# Altium PCB FMC_ADC_100M_10B_16CHA_TDC_PSU.PcbDoc (part 1 of 2)
Units mil, origin at the board's own origin, x right, y up, seen from the top; angles counter-clockwise.
Board outline 748.03 x 2716.54 mil, 6 copper layers (TOP, G1, L2, L3, P4, BOTTOM), stack 50.472 mil thick; 83 components, 50 nets, 259 pads, 166 vias.
Unrouted connection lines stored in the file: 1.
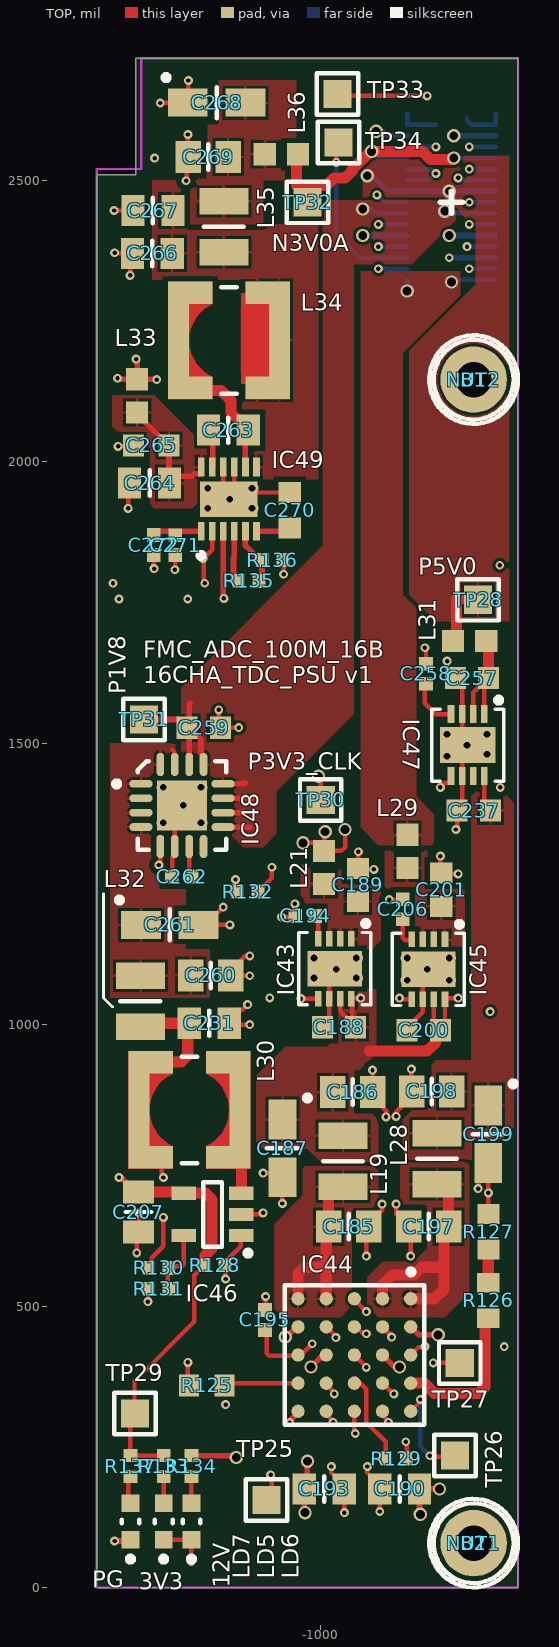
[diagram p0: TOP view]
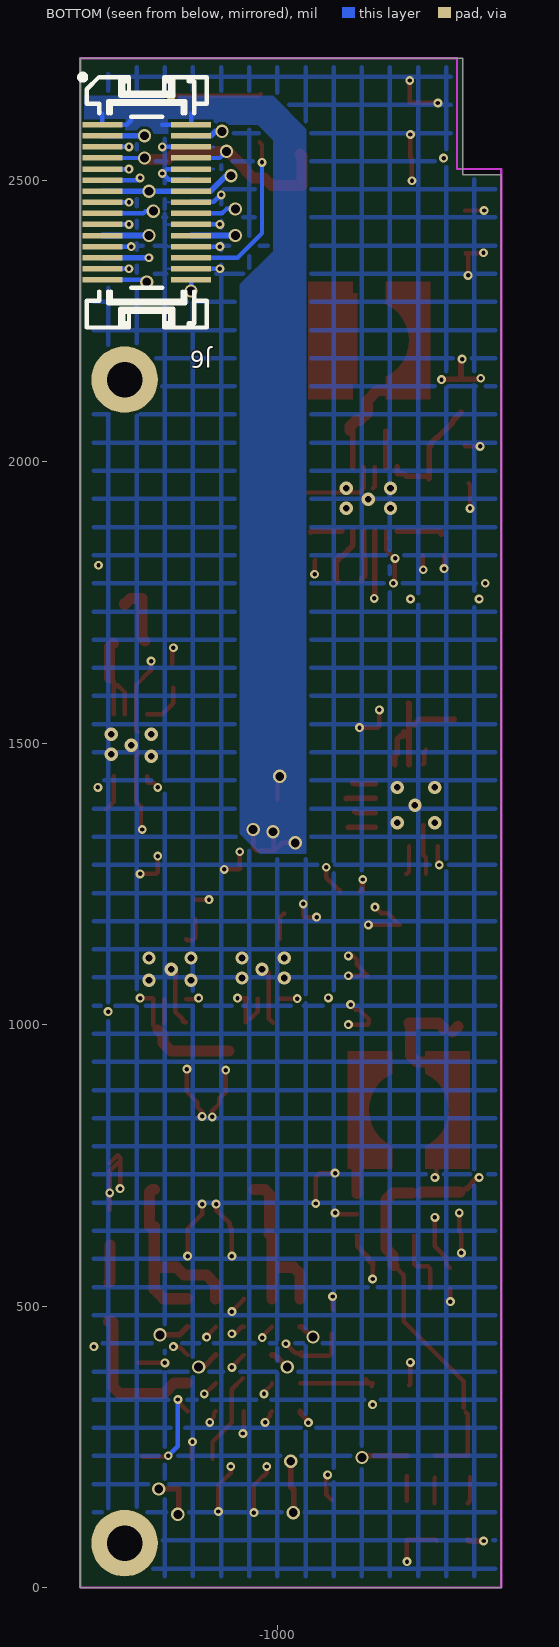
[diagram p1: BOTTOM view, seen from below]
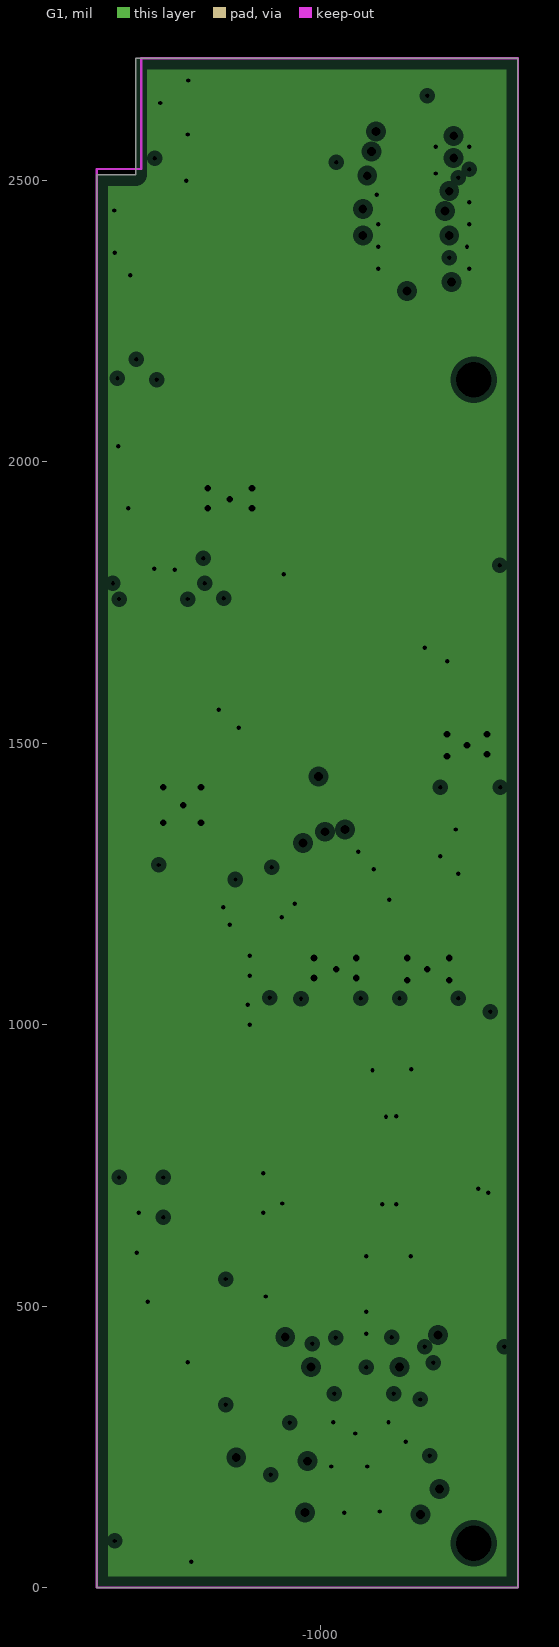
[diagram p2: G1, clearances drawn from the general rule]
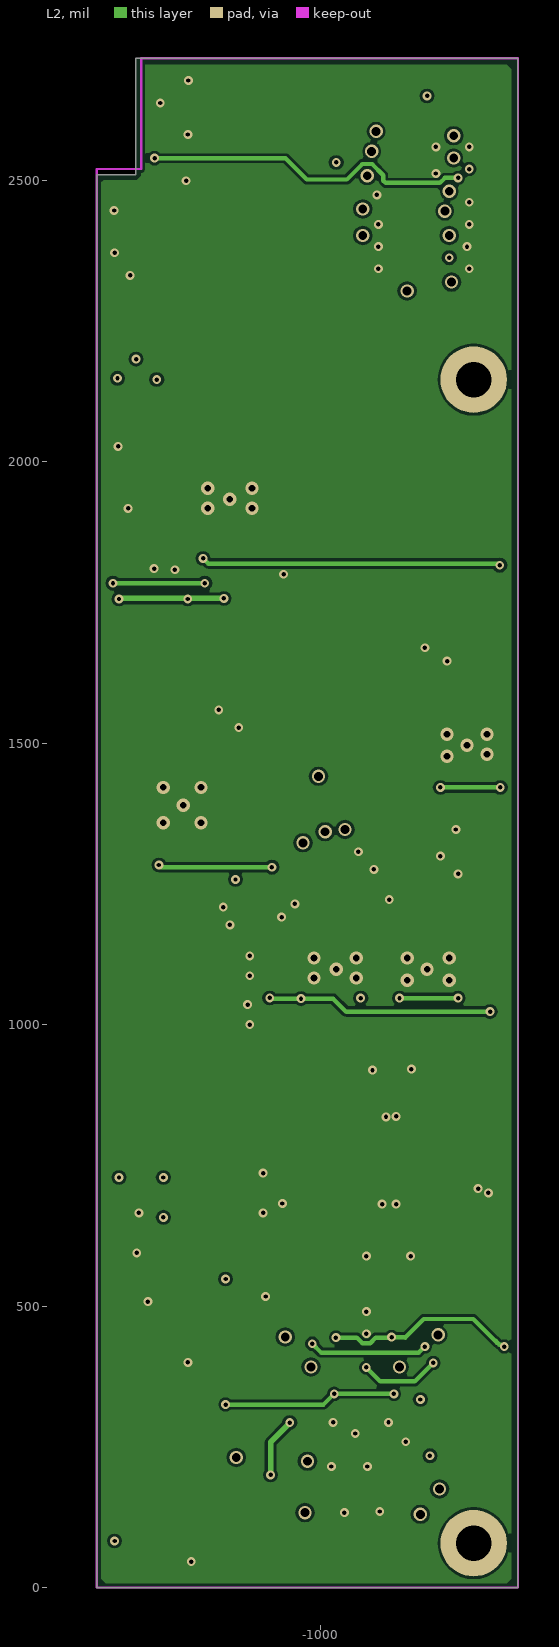
[diagram p3: L2]
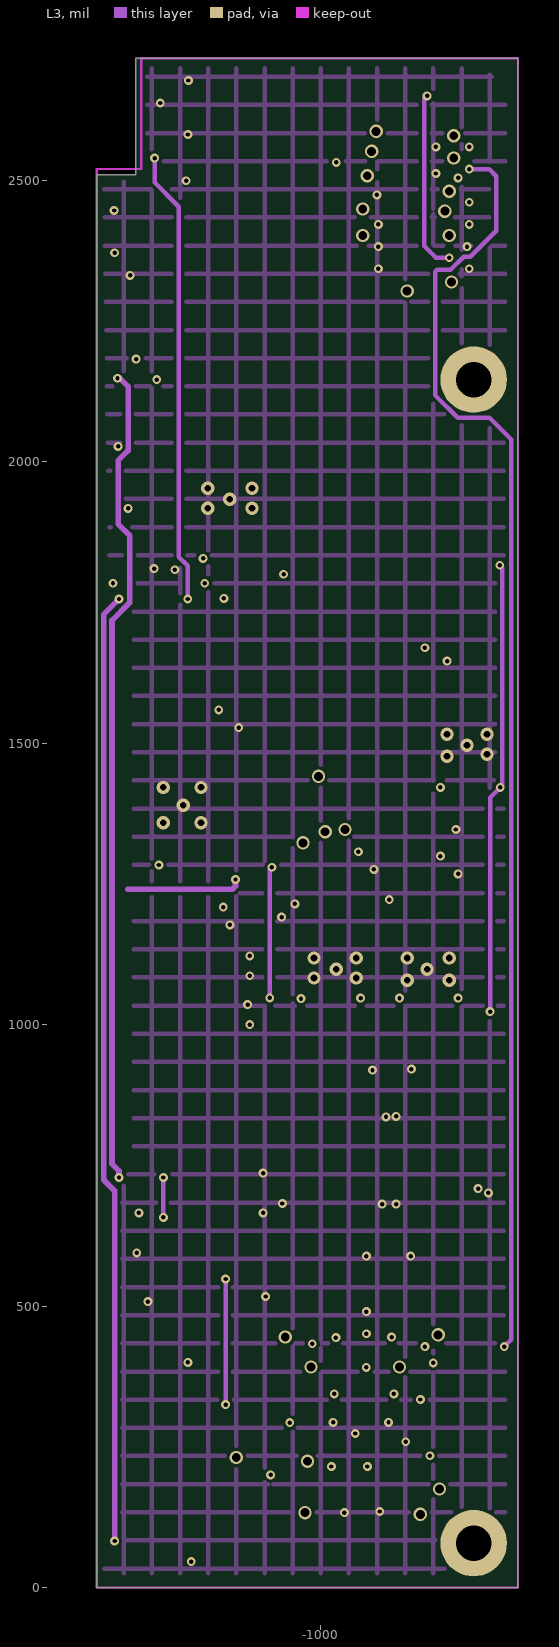
[diagram p4: L3]
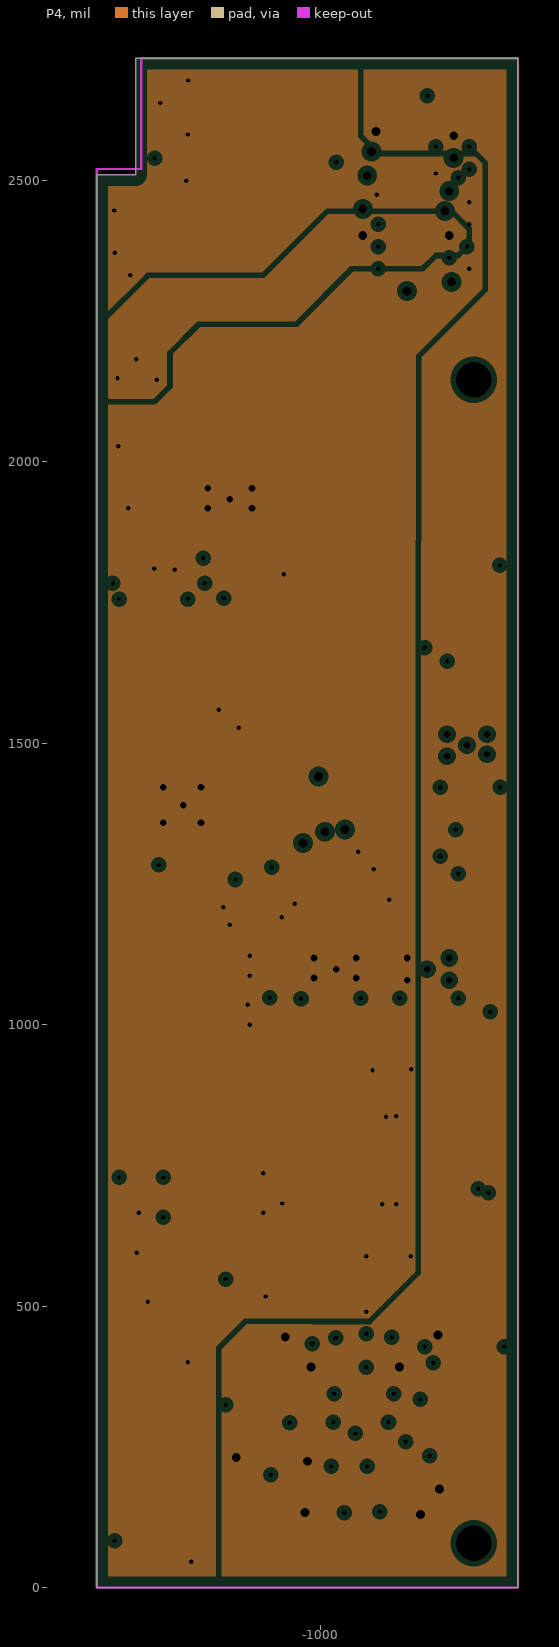
[diagram p5: P4, clearances drawn from the general rule]
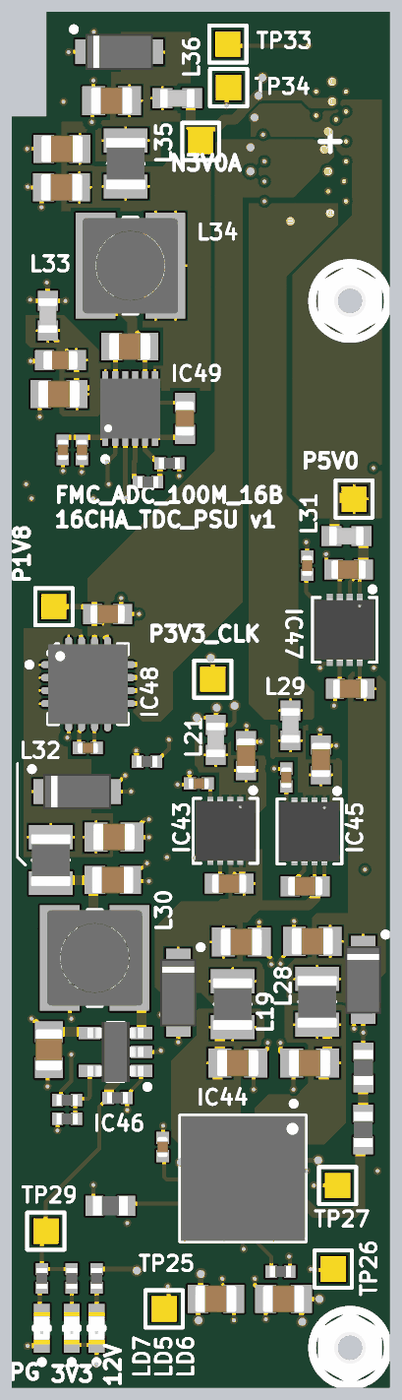
[diagram p7: 3D render of the assembled board from above, using the file's embedded part models]

## Layer stack, top to bottom
TopSolder: solder mask 0.3937, Solder Resist, Dk 3.5
TOP: signal copper 1.3778
Dielectric1: prepreg 7.0866, FR-4, Dk 4.8
G1: plane copper 0.7087, net GND
Dielectric2: core 11.811, FR-4, Dk 4.8
L2: signal copper 0.7087
Dielectric 3: prepreg 7.0866, FR-4, Dk 4.8
L3: signal copper 0.709
Dielectric 4: core 11.811, FR-4, Dk 4.8
P4: plane copper 0.7087, net (Multiple Nets)
Dielectric5: prepreg 7.0866, FR-4, Dk 4.8
BOTTOM: signal copper 1.3778
BottomSolder: solder mask 0.3937, Solder Resist, Dk 3.5

## Board outline
-1397.64,0 -1397.64,2450.79 -1397.64,2509.84 -1328.74,2509.84 -1328.74,2716.54 -649.61,2716.54 -649.61,0

## Design rules (kind name [scope] priority, off if disabled: settings)
AcuteAngle [All] p1: minimum=4.50000000000000E+0001 checktracksonly=FALSE
AssemblyTestPointUsage [All] p1 off:
AssemblyTestpoint [All] p1 off: testpointundercomponent=TRUE minsize=40 maxsize=100 preferedsize=60 minholesize=0 maxholesize=40 preferedholesize=32 testpointgrid=1 usegrid=TRUE gridtolerance=0.01 allowsidetop=TRUE allowsidebottom=TRUE
Clearance [All] p1: gap=5 ignorepadtopadclearanceinfootprint=FALSE
ComponentClearance NO_DRC [InComponentClass('NO_DRC')] p1 off: gap=0 collisioncheckmode=3 verticalgap=100000 showdistances=FALSE
ComponentClearance [All] p2 off: gap=1 collisioncheckmode=3 verticalgap=100000 showdistances=FALSE
DiffPairsRouting [All] p1: maxlimit=12 minlimit=8 mostfreqgap=10 toplayer_minwidth=15 toplayer_maxwidth=15 toplayer_prefwidth=15 midlayer1_minwidth=15 midlayer1_maxwidth=15 midlayer1_prefwidth=15 midlayer2_minwidth=15 midlayer2_maxwidth=15 midlayer2_prefwidth=15 bottomlayer_minwidth=15 bottomlayer_maxwidth=15 bottomlayer_prefwidth=15 maxuncoupledlength=600
FabricationTestPointUsage TestPointUsage [All] p1 off: valid=0 allowmultiple=FALSE
FabricationTestpoint Testpoint [All] p1 off: side=3 testpointundercomponent=TRUE minsize=40 maxsize=100 preferedsize=60 minholesize=0 maxholesize=40 preferedholesize=32 testpointgrid=1 allowsidetop=TRUE allowsidebottom=TRUE usegrid=TRUE gridtolerance=0.01
FanoutControl Fanout_BGA [IsBGA] p1 off: bgadir=Out bgaviamode=Centered fanoutstyle=Auto fanoutdirection=Alternating viagrid=1 // Fanout_BGA (Default Rule)
FanoutControl Fanout_LCC [IsLCC] p2 off: bgadir=Out bgaviamode=Centered fanoutstyle=Auto fanoutdirection=Alternating viagrid=1 // Fanout_LCC (Default Rule)
FanoutControl Fanout_SOIC [IsSOIC] p3 off: bgadir=Out bgaviamode=Centered fanoutstyle=Auto fanoutdirection=Alternating viagrid=1 // Fanout_SOIC (Default Rule)
FanoutControl Fanout_Small [(CompPinCount < 5)] p4 off: bgadir=Out bgaviamode=Centered fanoutstyle=Auto fanoutdirection=OutThenIn viagrid=1 // Fanout_Small (Default Rule)
FanoutControl Fanout_Default [All] p5 off: bgadir=Out bgaviamode=Centered fanoutstyle=Auto fanoutdirection=Alternating viagrid=1 // Fanout_Default (Default Rule)
Height Height_Top [OnTop] p1 off: minheight=0 maxheight=370 prefheight=350
Height Height_Bot [OnBottom] p2 off: minheight=0 maxheight=58 prefheight=52
HoleSize [All] p1: absolutevalues=TRUE maxlimit=1000 minlimit=5.91 maxpercent=80.000 minpercent=20.000
HoleToHoleClearance [All] p1: gap=5 allowstackedmicrovias=TRUE
MinimumAnnularRing [All] p1: minimumring=3.94
MinimumSolderMaskSliver [All] p1 off: minsoldermaskwidth=1
PlaneClearance [All] p1: clearance=9.84
PlaneConnect Vias_Plane [IsVia] p1: planeconnectstyle=Direct reliefexpansion=20 reliefentries=4 reliefconductorwidth=10 reliefairgap=10
PlaneConnect [All] p2: planeconnectstyle=Relief reliefexpansion=8 reliefentries=4 reliefconductorwidth=10 reliefairgap=8
PolygonConnect Vias [IsVia] p1: connectstyle=Direct reliefconductorwidth=10 reliefentries=4 polygonreliefangle="90 Angle" airgapwidth=10
PolygonConnect [All] p2: thpad.connectstyle=Relief thpad.reliefconductorwidth=16 thpad.reliefentries=4 thpad.polygonreliefangle="90 Angle" thpad.airgapwidth=10 smdpad.connectstyle=Relief smdpad.reliefconductorwidth=5 smdpad.reliefentries=4 smdpad.polygonreliefangle="90 Angle" smdpad.airgapwidth=5 via.connectstyle=Direct via.reliefconductorwidth=16 via.reliefentries=4 via.polygonreliefangle="90 Angle" via.airgapwidth=10
RoomDefinition FMC_ADC_100M_10B_8CHA_TDC_PSU [InComponentClass('FMC_ADC_100M_10B_8CHA_TDC_PSU')] p1 off: confinementstyle=ConfineIn formatcopy=TRUE lockcomponents=FALSE outline -1173.23,330.16 -1342.52,330.16 -1342.52,487.64 -1173.23,487.64
RoutingCorners [All] p1 off: cornerstyle=45-Degree minsetback=100 maxsetback=100
RoutingLayers [All] p1 off: top layer_v5=TRUE mid layer 1_v5=TRUE mid layer 2_v5=TRUE bottom layer_v5=TRUE
RoutingVias [All] p1: holewidth=5.91 width=15.75 viastyle="Through Hole" minholewidth=5.91 minwidth=15.75 maxholewidth=118.11 maxwidth=196.85
ShortCircuit SMA_1 [InPadClass('SMA')] p2: allowed=TRUE
SilkToSilkClearance [All] p1 off: silktosilkclearance=2
SilkToSolderMaskClearance SilkscreenOverComponentPads [IsPad] p1 off: minsilkscreentomaskgap=2 clearancetoexposedcopper=TRUE
SolderMaskExpansion [All] p1: expansion=4
ViasUnderSMD ViasUnderSMD_allow [InComponent('IC1A')   or InComponent('IC1B') or        InComponent('IC1C')   or InComponent('IC1D') or InComponent('IC6')   or InComponent('IC7') or InComponent('IC9')   or InComponent('IC10') or InComponent('IC11')   or InComponent('IC12') or InComponent('IC15A')     or InComponent('IC15B') or InComponent('IC15C') or InComponent('IC15D')  or InComponent('IC16')  or InComponent('IC3')] p1: allowed=TRUE
ViasUnderSMD [All] p2: allowed=FALSE
Width Width_1 [InNetClass('Buff_data')] p1 off: maxlimit=6.39 minlimit=3.74 preferedwidth=5.3 toplayer_minwidth=4.37 midlayer1_maxwidth=6.14 midlayer1_prefwidth=4.83 midlayer2_minwidth=3.86 midlayer2_maxwidth=6.32 midlayer2_prefwidth=4.98 bottomlayer_minwidth=4.37 minimp=45.000000 maximp=55.000000 favimp=50.000000
Width Width_3 [(InNet('RF1') OR InNet('RF2') OR InNet('RF3') OR InNet('RF4') OR InNet('RF5') OR InNet('RF6') OR InNet('RF7') OR InNet('EXT_CLK_IN'))] p2 off: maxlimit=5.72 minlimit=4.15 preferedwidth=5.3 toplayer_minwidth=4.73 midlayer1_maxwidth=5.33 midlayer1_prefwidth=4.83 midlayer2_minwidth=4.29 midlayer2_maxwidth=5.49 midlayer2_prefwidth=4.98 bottomlayer_minwidth=4.73 minimp=48.000000 maximp=53.000000 favimp=50.000000
Width Width_Pair_Diff [All] p3: maxlimit=19.68 minlimit=7.87 preferedwidth=11.81 checkconnectedcopper=TRUE
Width [All] p4: maxlimit=100 minlimit=3 preferedwidth=10 toplayer_maxwidth=20 midlayer2_maxwidth=20 minimp=45.000000 maximp=110.000000 favimp=100.000000 checkconnectedcopper=TRUE
9 further rules are at their usual default settings.

## Classes and differential pairs
pad class Direc: J3-37 J3-38
pad class SMA: J7-2

## Components (designator, comment, footprint, x,y, rotation, side; value= is the part's Value field where it differs from the comment)
B1 "Plated Hole" c300h160 -728.35,2145.67 r0 top
B2 "Plated Hole" c300h160 -728.35,78.74 r0 top
C185 "47uF" CAPC2012X140N -950.4,641.04 r180 top
C186 "47uF" CAPC2012X140N -943.4,879.97 r180 top
C187 "10uF" CAPMP3216X180N -1068,780 r270 top
C188 "4.7uF" CAPC1709X95N -967.52,995.25 r0 top
C189 "4.7uF" CAPC1709X95N -934,1248 r270 top
C190 "22uF" CAPC2012X135N -859.9,175.2 r0 top
C193 "22uF" CAPC2012X135N -993.76,175.2 r180 top
C194 "10nF" CAPC1005X55N -1027.56,1192.91 r0 top
C195 "100nF" CAPC1005X55N -1099,475.28 r270 top
C197 "47uF" CAPC2012X140N -808.4,641.04 r0 top
C198 "47uF" CAPC2012X140N -802.97,881.2 r0 top
C199 "10uF" CAPMP3216X180N -702.42,805.13 r270 top
C200 "4.7uF" CAPC1709X95N -817,990 r0 top
C201 "4.7uF" CAPC1709X95N -786,1239.53 r270 top
C206 "10nF" CAPC1005X55N -854.33,1204.72 r270 top
C207 "22uF" CAPC2012X135N -1324,667 r90 top
C231 "22uF" CAPC2012X135N -1197.83,1002.35 r180 top
C237 "4.7uF" CAPC1709X95N -728,1380 r0 top
C257 "4.7uF" CAPC1709X95N -731.32,1615.45 r0 top
C258 "10nF" CAPC1005X55N -813,1623 r270 top
C259 "4.7uF" CAPC1709X95N -1207.83,1527.37 r180 top
C260 "47uF" CAPC2012X140N -1195.27,1087.35 r180 top
C261 "10uF" CAPMP3216X180N -1268,1177 r0 top
C262 "10nF" CAPC1005X55N -1247,1263 r0 top
C263 "10uF" CAPC2012X135N -1164.06,2055.74 r0 top
C264 "22uF" CAPC2012X135N -1304.06,1961.74 r0 top
C265 "2.2uF" CAPC1608X87N -1301.06,2028.74 r0 top
C266 "22uF" CAPC2012X135N -1299,2370 r0 top
C267 "22uF" CAPC2012X135N -1298,2446 r0 top
C268 "10uF" CAPMP3216X180N -1185.04,2637.8 r0 top
C269 "47uF" CAPC2012X140N -1200,2541 r0 top
C270 "1uF" CAPC1608X87N -1054.97,1913.68 r270 top
C271 "100nF" CAPC1005X55N -1258.42,1851.63 r90 top
C272 "100nF" CAPC1005X55N -1296.42,1851.82 r90 top
IC43 "ADM7171ACPZ-3.3-R7" CP_8_21-L -974.99,1099.42 r270 top value=Value
IC44 "LTM4622AEY#PBF" BGA25C127P5X5_625X625X262 -940.21,413 r270 top
IC45 "ADM7171ACPZ-3.3-R7" CP_8_21-L -808.75,1098 r270 top value=Value
IC46 "TLV62565DBVT" SOT95P280X145-5N -1192.08,662.75 r180 top
IC47 "ADP7105ACPZ-5.0-R7" CP_8_5 -738.83,1496.25 r270 top value=Value
IC48 "ADP1740ACPZ-1.8-R7" QFN65P400X400X100-17N-S225 -1246.44,1389.21 r0 top
IC49 "TPS63710DRR" SON50P300X300X80-13N-R160X260 -1163.23,1933.37 r90 top
J6 "SlimStack™" MOLEX_52991-0308 -767.72,2460.63 r270 bottom locked
L19 "1uH" INDC2620X100N -960.4,757.3 r90 top
L21 "120R@100MHz" INDC1608X65N -994,1279 r90 top
L28 "1uH" INDC2620X100N -793.36,761.88 r90 top
L29 "120R@100MHz" INDC1608X65N -846,1307.53 r90 top
L30 "2.2uH" IND_WURTH_WE-TPC_4828 -1233.27,848.35 r180 top
L31 "120R@100MHz" INDC1608X65N -735.43,1681.51 r180 top
L32 "1uH" INDC2620X100N -1320.27,1041.56 r90 top
L33 "120R@100MHz" INDC1608X65N -1326.06,2116.74 r90 top
L34 "2.2uH" IND_WURTH_WE-TPC_4828 -1162.85,2215.35 r0 top
L35 "1uH" INDC2620X100N -1172,2417 r90 top
L36 "120R@100MHz" INDC1608X65N -1070,2546 r0 top
LD5 "Green" LED_KINGBRIGHT_KPH-1608CGCK -1278.88,117.38 r90 top
LD6 "Green" LED_KINGBRIGHT_KPH-1608CGCK -1229.67,117.38 r90 top
LD7 "Green" LED_KINGBRIGHT_KPH-1608CGCK -1337.94,117.38 r90 top
NUT1 "M1.6" BOSSARD_BN628-1241389_v -728.35,78.74 r0 top
NUT2 "M1.6" BOSSARD_BN628-1241389_v -728.35,2145.67 r0 top
R125 "11k8" RESC1608X55N -1202.5,359 r180 top
R126 "5k62" RESC1608X55N -702.42,509.85 r90 top
R127 "1k78" RESC1608X55N -702,632 r90 top
R128 "10k" RESC1005X40N -1188.27,572.35 r0 top
R129 "200k" RESC1005X40N -866,229 r180 top
R130 "100k" RESC1005X40N -1287.91,567.74 r180 top
R131 "43k" RESC1005X40N -1287.91,530.74 r0 top
R132 "10k" RESC1005X40N -1129.92,1236.22 r0 top
R133 "1k" RESC1005X40N -1278.88,215.8 r90 top
R134 "10k" RESC1005X40N -1229.67,215.8 r90 top
R135 "160k" RESC1005X40N -1128,1788 r0 top
R136 "56k" RESC1005X40N -1085.68,1825.1 r0 top
R137 "1k" RESC1005X40N -1337.94,215.8 r90 top
TP25 "Test Point" TPS127 -1096.12,155.52 r270 top
TP26 "Test Point" TPS127 -761.47,234.26 r270 top
TP27 "Test Point" TPS127 -753,399 r270 top
TP28 "Test Point" TPS127 -720.43,1754.51 r270 top
TP29 "Test Point" TPS127 -1330,309 r270 top
TP30 "Test Point" TPS127 -1000,1399 r90 top
TP31 "Test Point" TPS127 -1314,1542 r180 top
TP32 "Test Point" TPS127 -1023.62,2460.63 r90 top
TP33 "Test Point" TPS127 -970,2653 r180 top
TP34 "Test Point" TPS127 -968.5,2566.93 r0 top

## Footprints (in the part's own frame and the unit in brackets; to place one, negate y for a bottom-side part, rotate by r counter-clockwise, add the part's x,y. Pads: shape width x height; smd on the part's side, far side on the other; paste and mask are expansions set on the pad)
BGA25C127P5X5_625X625X262 [mm] "BGA, 1.27mm Pitch, Square; 25 Pin, 5 Columns X 5 Rows, 6.25mm X 6.25mm X 2.62mm H"
  round 0.6 smd: A1(-2.54,2.54) A2(-1.27,2.54) A3(0,2.54) A4(1.27,2.54) A5(2.54,2.54) B1(-2.54,1.27) B2(-1.27,1.27) B3(0,1.27) B4(1.27,1.27) B5(2.54,1.27) C1(-2.54,0) C2(-1.27,0) C3(0,0) C4(1.27,0) C5(2.54,0) D1(-2.54,-1.27) D2(-1.27,-1.27) D3(0,-1.27) D4(1.27,-1.27) D5(2.54,-1.27) E1(-2.54,-2.54) E2(-1.27,-2.54) E3(0,-2.54) E4(1.27,-2.54) E5(2.54,-2.54)
  silkscreen extent -3.87,-3.15 3.15,3.15, body extent -3.12,-3.12 3.13,3.13, height 2.62
BOSSARD_BN628-1241389_v [mil] "M1.6 Hexagon Nut ~0,8d, ISO 4032, DIN 934, Stainless Steel A2"
  silkscreen extent -79,-79 79,79, body extent -63,-73 63,73, height 51
c300h160 [mm] "Plated Through Hole: Hole Dia.=1.6mm Pad Dia.=3mm"
  round 3 hole 1.6: 1(0,0)
  silkscreen extent -1.8,-1.8 1.8,1.8
CAPC1005X55N [mm] "Capacitor, Non-Polarized, Chip; 1.00mm L X 0.50mm W X 0.70mm H, IPC Medium Density"
  rect 0.62x0.62 smd: 1(-0.45,0) 2(0.45,0)
  body extent -0.52,-0.27 0.53,0.28, height 0.55
CAPC1608X87N [mm] "Chip Capacitor, Body 1.6x0.8mm IPC Medium Density"
  rect 0.95x1 smd: 1(-0.8,0) 2(0.8,0)
  body extent -0.87,-0.47 0.88,0.48, height 0.87
CAPC1709X95N [mm] "Capacitor, non-Polarized, Chip; 1.65mm L X 0.85mm W X 0.95mm H,IPC Medium Density"
  rect 0.95x1 smd: 1(-0.75,0) 2(0.75,0)
  body extent -0.87,-0.47 0.88,0.48, height 0.95
CAPC2012X135N [mm] "Chip Capacitor, Body 2.0x1.25mm, IPC Medium Density"
  rect 1.05x1.4 smd: 1(-0.9,0) 2(0.9,0)
  silkscreen extent 0,-0.58 0,0.58, body extent -1.05,-0.67 1.05,0.68, height 1.25
CAPC2012X140N [mm] "Chip Capacitor, Body 2.0x1.25mm, IPC Medium Density"
  rect 1.15x1.45 smd: 1(-0.9,0) 2(0.9,0)
  silkscreen extent 0,-0.58 0,0.58, body extent -1.05,-0.67 1.05,0.68, height 1.3
CAPMP3216X180N [mm] "Capacitor, Polarized, Molded  Body 3.2x1.6mm, IPC Medium Density"
  rect 1.8x1.25 smd: 1(-1.3,0) 2(1.3,0)
  silkscreen extent -2.4,-0.7 0,1.25, body extent -1.7,-0.9 1.7,0.9, height 1.6
CP_8_5 [mil]
  rect 32x12 smd paste+0 mask+0: 1(-55,29.53) 2(-55,9.84) 3(-55,-9.84) 4(-55,-29.53) 5(55,-29.53) 6(55,-9.84) 7(55,9.84) 8(55,29.53)
  rect 64x98 smd paste-48.5 mask+0: 9(0,0)
  silkscreen extent -85,-64 64,64, body extent -61,-59 61,59, height 31
CP_8_21-L [mm]
  rect 0.703x0.3 smd paste+0 mask+0: 1(-1.352,0.75) 2(-1.352,0.25) 3(-1.352,-0.25) 4(-1.352,-0.75) 5(1.352,-0.75) 6(1.352,-0.25) 7(1.352,0.25) 8(1.352,0.75)
  rect 1.6x2.44 smd paste-1.207 mask+0: 9(0,0)
  silkscreen extent -2.16,-1.63 1.63,1.63, body extent -1.55,-1.5 1.55,1.5, height 0.78
IND_WURTH_WE-TPC_4828 [mm] "Shielded Tiny Power Inductor, Body 4.8x4.8mm"
  rect 0.95x5.3 smd: 1(-2.275,0) 2(2.275,0)
  rect 1.05x1.014 smd: 1(-1.275,2.143) 1(-1.275,-2.143) 2(1.275,2.143) 2(1.275,-2.143)
  TOP region: 2.75,-2.65 0.75,-2.65 0.75,-1.636 1.394,-1.138 1.753,-0.407 1.753,0.407 1.394,1.138 0.75,1.636 0.75,1.636 0.75,2.65 2.75,2.65
  TOP region: -2.75,-2.65 -0.75,-2.65 -0.75,-1.636 -1.394,-1.138 -1.753,-0.407 -1.753,0.407 -1.394,1.138 -0.75,1.636 -0.75,1.636 -0.75,2.65 -2.75,2.65
  TOP region: 0.75,-2.65 2.75,-2.65 2.75,2.65 0.75,2.65 0.75,1.636 1.394,1.138 1.753,0.407 1.753,-0.407 1.394,-1.138 0.75,-1.636 0.75,-1.636
  silkscreen extent -0.35,-2.4 0.35,2.4, body extent -2.4,-2.4 2.4,2.4, height 2.8
INDC1608X65N [mm] "Chip Inductor, 2-Leads, EIA 0603, Metric 1608, Body 1.6x0.8mm, IPC Medium Density"
  rect 1x1 smd: 1(-0.75,0) 2(0.75,0)
  body extent -0.87,-0.47 0.88,0.48, height 0.65
INDC2620X100N [mm] "Chip Inductor, EIA 1008, Metric 2520, Body 2.60mm L X 2.00mm W X 1.00mm H, IPC Medium Density"
  rect 1.2x2.2 smd: 1(-1.15,0) 2(1.15,0)
  silkscreen extent 0,-0.9 0,0.9, body extent -1.3,-1 1.3,1, height 1
LED_KINGBRIGHT_KPH-1608CGCK [mm] "SMT Green LED, Case 0603, Body L 1.6 x W 0.8mm H 0.65mm"
  rect 0.8x0.8 smd: 1(-0.825,0) 2(0.825,0)
  silkscreen extent -1.82,-0.4 0.08,0.4, body extent -0.8,-0.4 0.8,0.4, height 0.65
MOLEX_52991-0308 [mm] "0.50mm Pitch SlimStack™ Dual Row 30 Circuits Surface Mount Vertical Receptacle (3.00 and 4.00mm Stacking Heights)"
  rect 0.25x1.8 smd: 1(-3.5,-2) 2(-3.5,2) 3(-3,-2) 4(-3,2) 5(-2.5,-2) 6(-2.5,2) 7(-2,-2) 8(-2,2) 9(-1.5,-2) 10(-1.5,2) 11(-1,-2) 12(-1,2) 13(-0.5,-2) 14(-0.5,2) 15(0,-2) 16(0,2) 17(0.5,-2) 18(0.5,2) 19(1,-2) 20(1,2) 21(1.5,-2) 22(1.5,2) 23(2,-2) 24(2,2) 25(2.5,-2) 26(2.5,2) 27(3,-2) 28(3,2) 29(3.5,-2) 30(3.5,2)
  silkscreen extent -5.77,-3.01 5.65,2.7, body extent -5.65,-2.7 5.65,2.7, height 2.32
QFN65P400X400X100-17N-S225 [mm] "QFN, 0.65mm pitch,square; 4 pin X 4 pin, 4mm X 4mm X 1mm H body (w/thermal tab 2.25 X 2.25mm),  IPC Medium Density"
  oval 1.05x0.35 smd: 1(-1.85,0.975) 2(-1.85,0.325) 3(-1.85,-0.325) 4(-1.85,-0.975) 9(1.85,-0.975) 10(1.85,-0.325) 11(1.85,0.325) 12(1.85,0.975)
  oval 0.35x1.05 smd: 5(-0.975,-1.85) 6(-0.325,-1.85) 7(0.325,-1.85) 8(0.975,-1.85) 13(0.975,1.85) 14(0.325,1.85) 15(-0.325,1.85) 16(-0.975,1.85)
  rect 2.25x2.25 smd: 17(0,0)
  silkscreen extent -3.07,-2 2,2, body extent -2,-2 2,2, height 1
RESC1005X40N [mm] "Chip Resistor, EIA 0402, Metric 1005, Body 1.0x0.5mm, IPC Medium Density"
  rect 0.58x0.62 smd: 1(-0.47,0) 2(0.47,0)
  body extent -0.52,-0.27 0.53,0.28, height 0.4
RESC1608X55N [mm] "Chip Resistor, EIA 0603, Metric 1608, Body 1.6x0.8mm, IPC Medium Density"
  rect 0.9x1 smd: 1(-0.8,0) 2(0.8,0)
  body extent -0.87,-0.47 0.88,0.48, height 0.55
SON50P300X300X80-13N-R160X260 [mm] "SON, 0.50mm Pitch, 12-Pin, 3.00mm W  X 3.00mm L X 0.80mm Height, (w/Thermal Tab 1.6 X 2.6 mm), IPC Medium Density"
  rect 0.85x0.3 smd: 1(-1.45,1.25) 2(-1.45,0.75) 3(-1.45,0.25) 4(-1.45,-0.25) 5(-1.45,-0.75) 6(-1.45,-1.25) 7(1.45,-1.25) 8(1.45,-0.75) 9(1.45,-0.25) 10(1.45,0.25) 11(1.45,0.75) 12(1.45,1.25)
  rect 1.6x2.6 smd: 13(0,0)
  silkscreen extent -2.66,1.12 -2.42,1.37, body extent -1.5,-1.5 1.5,1.5, height 0.8
SOT95P280X145-5N [mm] "SOT, 0.95mm pitch; 5 pin, 1.60mm W X 2.90mm L X 1.45mm H body, IPC Medium Density"
  rect 1.1x0.6 smd: 1(-1.3,0.95) 2(-1.3,0) 3(-1.3,-0.95) 4(1.3,-0.95) 5(1.3,0.95)
  silkscreen extent -1.73,-1.45 0.43,1.87, body extent -1.4,-1.5 1.4,1.5, height 1.45
TPS127 [mil] "1.27 x  1.27mm SMD Test Point Area"
  rect 50x50 smd paste-50: 1(0,0)
  silkscreen extent -37,-37 37,37

## Part data
B1 B2: library part PLATED_HOLE1.6_PAD3.0, "Single Terminal Socket", Author="CERN DEM JMW", ComponentHeight=0mm, Component Type="Standard (No BOM)", CreateDate=05.11.2009, Family="Plated Hole", HelpURL=Undefined, LatestRevisionDate=05.11.2009, Mounted=No, PackageDescription="Plated Through Hole: Hole Dia.=1.6mm Pad Dia.=3.0mm", Part Description="Plated Through Hole: Hole Dia.=1.6mm Pad Dia.=3.0mm", Part Number=PLATED_HOLE1.6_PAD3.0, Pin Count=1, Sense=No, SMD=No, Socket=No, Status=None
C185 C186 C197 C198 C260 C269: library part CC0805_47UF_6.3V_20%_X5R, "Non-polarised capacitor", Case=0805, Manufacturer=GENERIC, Manufacturer1 ComponentHeight=1.4mm, Manufacturer1 Example=KEMET, Manufacturer1 Part Number=C0805C476M9PACTU, Tolerance=±20%, Voltage=6.3V, Author="CERN DEM JLC", Component Type=Standard, CreateDate=16.10.2012, HelpURL=\\cern.ch\dfs\Applications\Altium\Datasheets\CC0805_X5R_KEMET.pdf, LatestRevisionDate=16.10.2012, Manufacturer Part Number=CC0805_47UF_6.3V_20%_X5R, Mounted=Yes, Part Description="SMD Multilayer Chip Ceramic Capacitor", Part Number=CC0805_47UF_6.3V_20%_X5R, Pin Count=2, Sense=No, SMD=Yes, Socket=No, Status=Preferred, TC=X5R
C187 C199 C261 C268: library part CTE3216-18_10UF_10V_10%_LESR1800, "Polarised capacitor", Case=A, Manufacturer=GENERIC, Manufacturer1 ComponentHeight=1.8mm, Manufacturer1 Example=AVX, Manufacturer1 Part Number=TPSA106K010R1800, Tolerance=±10%, Voltage=10V, Author="CERN DEM JLC", Component Type=Standard, CreateDate=05.05.2008, HelpURL=\\cern.ch\dfs\Applications\Altium\Datasheets\CTE-LESR_AVX_TPS.pdf, LatestRevisionDate=20.01.2009, Manufacturer Part Number=CTE3216-18_10UF_10V_10%_LESR1800, Mounted=Yes, Part Description="Low ESR 1R8 Solid Tantalum Chip Capacitor", Part Number=CTE3216-18_10UF_10V_10%_LESR1800, Pin Count=2, Sense=No, SMD=Yes, Socket=No, Status=Preferred
C188 C189 C200 C201 C237 C257 C259: library part CC0603_4.7UF_16V_10%_X5R, "Non-polarised capacitor", Case=0603, Manufacturer=GENERIC, Manufacturer1 ComponentHeight=0.95mm, Manufacturer1 Example="TAIYO YUDEN", Manufacturer1 Part Number=EMK107ABJ475KA-T, Tolerance=±10%, Voltage=16V, Author="CERN DEM JLC", Component Type=Standard, CreateDate=16.12.2013, HelpURL=\\cern.ch\dfs\Applications\Altium\Datasheets\CC0603_X7R_TAIYO-YUDEN_HIGH-VALUE.pdf, LatestRevisionDate=16.09.2014, Manufacturer Part Number=CC0603_4.7UF_16V_10%_X5R, Mounted=Yes, Part Description="SMD Multilayer Chip Ceramic Capacitor", Part Number=CC0603_4.7UF_16V_10%_X5R, Pin Count=2, Sense=No, SMD=Yes, Socket=No, Status=None, TC=X5R
C190 C193 C207 C231 C264 C266 C267: library part CC0805_22UF_16V_10%_X5R, "Non-polarised capacitor", Case=0805, Manufacturer=GENERIC, Manufacturer1 ComponentHeight=1.35mm, Manufacturer1 Example=TDK, Manufacturer1 Part Number=C2012X5R1C226KT, Tolerance=±10%, Voltage=16V, Author="CERN DEM JLC", Component Type=Standard, CreateDate=25.10.2012, HelpURL=\\cern.ch\dfs\Applications\Altium\Datasheets\CC0805_X5R_TDK_C.pdf, LatestRevisionDate=25.10.2012, Manufacturer Part Number=CC0805_22UF_16V_10%_X5R, Mounted=Yes, Part Description="SMD Multilayer Chip Ceramic Capacitor", Part Number=CC0805_22UF_16V_10%_X5R, Pin Count=2, Sense=No, SMD=Yes, Socket=No, Status=Preferred, TC=X5R
C194 C206 C258 C262: library part CC0402_10NF_16V_10%_X7R, "Non-polarised capacitor", Case=0402, Manufacturer=GENERIC, Manufacturer1 ComponentHeight=0.55mm, Manufacturer1 Example=PHYCOMP, Manufacturer1 Part Number=223878715636, Tolerance=±10%, Voltage=16V, Author="CERN DEM JLC", Component Type=Standard, CreateDate=03.12.2007, HelpURL=\\cern.ch\dfs\Applications\Altium\Datasheets\CC0402_X7R_PHYCOMP.pdf, LatestRevisionDate=03.12.2007, Manufacturer Part Number=CC0402_10NF_16V_10%_X7R, Mounted=Yes, Part Description="SMD Multilayer Chip Ceramic Capacitor", Part Number=CC0402_10NF_16V_10%_X7R, Pin Count=2, Sense=No, SMD=Yes, Socket=No, Status="Not Recommended", TC=X7R
C195 C271 C272: library part CC0402_100NF_16V_10%_X5R, "Non-polarised capacitor", Case=0402, Manufacturer=GENERIC, Manufacturer1 ComponentHeight=0.55mm, Manufacturer1 Example=MURATA, Manufacturer1 Part Number=GRM155R61C104KA88D, Tolerance=±10%, Voltage=16V, Author="CERN DEM JLC", Component Type=Standard, CreateDate=10.12.2013, HelpURL=\\cern.ch\dfs\Applications\Altium\Datasheets\CC0402_X5R_MURATA_GRM.pdf, LatestRevisionDate=10.12.2013, Manufacturer Part Number=CC0402_100NF_16V_10%_X5R, Mounted=Yes, Part Description="SMD Multilayer Chip Ceramic Capacitor", Part Number=CC0402_100NF_16V_10%_X5R, Pin Count=2, Sense=No, SMD=Yes, Socket=No, Status=None, TC=X5R
C263: library part CC0805_10UF_16V_10%_X5R, "Non-polarised capacitor", Case=0805, Manufacturer=GENERIC, Manufacturer1 ComponentHeight=1.4mm, Manufacturer1 Example=KEMET, Manufacturer1 Part Number=C0805C106K4PAC, Tolerance=±10%, Voltage=16V, Author="CERN DEM JLC", Component Type=Standard, CreateDate=03.12.2007, HelpURL=\\cern.ch\dfs\Applications\Altium\Datasheets\CC1206_X5R_KEMET.pdf, LatestRevisionDate=03.12.2007, Manufacturer Part Number=CC0805_10UF_16V_10%_X5R, Mounted=Yes, Part Description="SMD Multilayer Chip Ceramic Capacitor", Part Number=CC0805_10UF_16V_10%_X5R, Pin Count=2, Sense=No, SMD=Yes, Socket=No, Status=Preferred, TC=X5R
C265: library part CC0603_2.2UF_16V_10%_X5R, "Non-polarised capacitor", Case=0603, Manufacturer=GENERIC, Manufacturer1 ComponentHeight=0.9mm, Manufacturer1 Example=YAGEO, Manufacturer1 Part Number=CC0603KRX5R7BB225, Tolerance=±10%, Voltage=16V, Author="CERN DEM JLC", Component Type=Standard, CreateDate=28.04.2011, HelpURL=\\cern.ch\dfs\Applications\Altium\Datasheets\CC0805_X5R_PHYCOMP_HC.pdf, LatestRevisionDate=28.04.2011, Manufacturer Part Number=CC0603_2.2UF_16V_10%_X5R, Mounted=Yes, Part Description="SMD Multilayer Chip Ceramic Capacitor", Part Number=CC0603_2.2UF_16V_10%_X5R, Pin Count=2, Sense=No, SMD=Yes, Socket=No, Status=Preferred, TC=X5R
C270: library part CC0603_1UF_16V_10%_X7R, "Non-polarised capacitor", Case=0603, Manufacturer=GENERIC, Manufacturer1 ComponentHeight=0.9mm, Manufacturer1 Example="YAGEO PHYCOMP", Manufacturer1 Part Number=223878615663, Manufacturer Part Number=CC0603_1uF_16V_10%_X7R, Tolerance=±10%, Voltage=16V, Author="CERN DEM JLC", Component Type=Standard, CreateDate=03.12.2007, HelpURL=\\cern.ch\dfs\Applications\Altium\Datasheets\CC0603_X7R_PHYCOMP.pdf, LatestRevisionDate=17.04.2015, Mounted=Yes, Part Description="SMD Multilayer Chip Ceramic Capacitor", Part Number=CC0603_1UF_16V_10%_X7R, Pin Count=2, Sense=No, SMD=Yes, Socket=No, Status=None, TC=X7R
IC43 IC45: "6.5 V, 1 A, Ultralow Noise, High PSRR,  Fast Transient Response CMOS LDO", Manufacturer="Analog Devices", Manufacturer Part Number=ADM7171ACPZ-3.3-R7, Type=Type
IC44: "3.6V-20V To 1.5V-12V, Dual 2A or Single 4A  Ultrathin Step-Down DC/DC µModule Regulator", Case=BGA25, Manufacturer="LINEAR TECHNOLOGY", Author="CERN DEM MR", Bonding=No, ComponentHeight=2.62mm, Component Type=Standard, CreateDate=29.09.2017, Device=LTM4622AEY#PBF, HelpURL=\\cern.ch\dfs\Applications\Altium\Datasheets\LTM4622AEY#PBF.pdf, LatestRevisionDate=29.09.2017, Manufacturer Part Number=LTM4622AEY#PBF, Mounted=Yes, PackageDescription="BGA, 1.27mm Pitch, Square; 25 Pin, 5 Columns X 5 Rows, 6.25mm X 6.25mm X 2.62mm H", Part Description="3.6V-20V To 1.5V-12V, Dual 2A or Single 4A  Ultrathin Step-Down DC/DC uModule Regulator", Part Number=LTM4622AEY#PBF, Pin Count=25, PressFit=No, Sense=No, SMD=Yes, Socket=No
IC46: "1.5A High Efficiency Step-Down Converter, Adjustable Output Voltage", Case=SOT23-5, Manufacturer="TEXAS INSTRUMENTS", Author="CERN DEM JMW", Bonding=No, ComponentHeight=1.45mm, Component Type=Standard, CreateDate=29.08.2016, Device=TLV62565DBVT, HelpURL=\\cern.ch\dfs\Applications\Altium\Datasheets\TLV62565DBVT.pdf, LatestRevisionDate=29.08.2016, Manufacturer Part Number=TLV62565DBVT, Mounted=Yes, PackageDescription="SOT, 0.95mm Pitch; 5 Pin, 1.60mm W X 2.90mm L X 1.45mm H Body, IPC Medium Density", Part Description="1.5A High Efficiency Step-Down Converter, Adjustable Output Voltage", Part Number=TLV62565DBVT, Pin Count=5, PressFit=No, Sense=No, SMD=Yes, Socket=No
IC47: "20 V, 500 mA, Low Noise LDO Regulator  with Soft Start", Manufacturer="Analog Devices", Manufacturer Part Number=ADP7105ACPZ-5.0-R7, Type=Type
IC48: "2A, Low-Dropout Linear Regulator", Case=QFN16, Manufacturer="ANALOG DEVICES", Author="CERN DEM JLC", Bonding=No, ComponentHeight=1mm, Component Type=Standard, CreateDate=05.02.2013, Device=ADP1740ACPZ-1.8-R7, HelpURL=\\cern.ch\dfs\Applications\Altium\Datasheets\ADP1740ACPZ-1.8-R7.pdf, LatestRevisionDate=05.02.2013, Manufacturer Part Number=ADP1740ACPZ-1.8-R7, Mounted=Yes, PackageDescription="QFN, 0.65mm pitch,square; 4 pin X 4 pin, 4mm X 4mm X 1mm H body (w/thermal tab 2.25 X 2.25mm),  IPC Medium Density", Part Description="1.8V, 2A, Low-Dropout Linear Regulator", Part Number=ADP1740ACPZ-1.8-R7, Pin Count=17, PressFit=No, Sense=No, SMD=Yes, Socket=No
IC49: "-1 to -5.5VDC, 1A Output, Low Noise Synchronous Inverting Buck Converter", Case=SON12, Manufacturer="TEXAS INSTRUMENTS", Author="CERN DEM BC", Bonding=No, ComponentHeight=0.8mm, Component Type=Standard, CreateDate=11.02.2019, Device=TPS63710DRR, HelpURL=\\cern.ch\dfs\Applications\Altium\Datasheets\TPS63710DRR.pdf, LatestRevisionDate=11.02.2019, Manufacturer Part Number=TPS63710DRR, Mounted=Yes, PackageDescription="SON, 0.50mm Pitch, 12-Pin, 3.00mm W  X 3.00mm L X 0.80mm Height, (w/Thermal Tab 1.6 X 2.6 mm), IPC Medium Density", Part Description="-1 to -5.5VDC, 1A Output, Low Noise Synchronous Inverting Buck Converter", Part Number=TPS63710DRR, Pin Count=13, PressFit=No, Sense=No, SMD=Yes, Socket=No
J6: library part MOLEX_52991-0308, "Connector 30 Female", Manufacturer=MOLEX, Manufacturer Part Number=52991-0308, Author="CERN DEM JLC", ComponentHeight=2.27mm, Component Type=Standard, CreateDate=28.08.2012, Family=SlimStack™, HelpURL=\\cern.ch\dfs\Applications\Altium\Datasheets\MOLEX_52991-0308.pdf, LatestRevisionDate=28.08.2012, Mounted=Yes, Part Description="0.50mm Pitch SlimStack™ Dual Row 30 Circuits Surface Mount Vertical Receptacle (3.00 and 4.00mm Stacking Heights)", Part Number=MOLEX_52991-0308, Pin Count=30, PressFit=No, Sense=No, SMD=Yes, Socket=No, Status=None
L19 L28 L32 L35: library part IND1008_1UH_20%_WURTH_74479787210B, "Inductor", Case=1008, Manufacturer="WURTH ELEKTRONIK", Manufacturer Part Number=74479787210B, Power=1.95A, Resistance=0.06R, Tolerance=±20%, Author="CERN DEM JLC", ComponentHeight=1mm, Component Type=Standard, CreateDate=01.10.2014, HelpURL=\\cern.ch\dfs\Applications\Altium\Datasheets\IND_WURTH_WE-PMI_74479787210B.pdf, LatestRevisionDate=01.10.2014, Mounted=Yes, Part Description="Power Multilayer Inductor (WE-PMI Series)", Part Number=IND1008_1UH_20%_WURTH_74479787210B, Pin Count=2, Sense=No, SMD=Yes, Socket=No, Status=None
L21 L29 L31 L33 L36: library part IND0603_MURATA_BLM18SG121TN1D, "Inductor", Case=0603, Manufacturer=MURATA, Manufacturer Part Number=BLM18SG121TN1D, Power=3A, Resistance=0.025R, Tolerance=±25%, Author="CERN DEM JLC", ComponentHeight=0.65mm, Component Type=Standard, CreateDate=23.07.2014, HelpURL=\\cern.ch\dfs\Applications\Altium\Datasheets\IND0603_MURATA_BLM18S.pdf, LatestRevisionDate=23.07.2014, Mounted=Yes, Part Description="SMD EMIFIL Suppression Chip Ferrite Bead", Part Number=IND0603_MURATA_BLM18SG121TN1D, Pin Count=2, Sense=No, SMD=Yes, Socket=No, Status=None
L30 L34: library part IND_2.2UH_30%_WURTH_WE-TPC_7440430022, "Inductor With Core", Manufacturer="WURTH ELEKTRONIK", Manufacturer Part Number=7440430022, Power=2.5A, Resistance=0.023R, Tolerance=±30%, Author="CERN DEM JLC", ComponentHeight=3mm, Component Type=Standard, CreateDate=19.11.2012, HelpURL=\\cern.ch\dfs\Applications\Altium\Datasheets\IND_WURTH_WE-TPC_7440430022.pdf, LatestRevisionDate=19.11.2012, Mounted=Yes, Part Description="Shielded Tiny Power Inductor (WE-TPC Series)", Part Number=IND_2.2UH_30%_WURTH_WE-TPC_7440430022, Pin Count=2, Sense=No, SMD=Yes, Socket=No, Status=None
LD5 LD6 LD7: library part LED_KINGBRIGHT_KPH-1608CGCK, "LED Green 1C 2A", Manufacturer=KINGBRIGHT, Manufacturer Part Number=KPH-1608CGCK, Author="CERN DEM JLC", Bonding=No, Color=Green, ComponentHeight=0.65mm, Component Type=Standard, CreateDate=03.07.2017, HelpURL=\\cern.ch\dfs\Applications\Altium\Datasheets\LED_KINGBRIGHT_KPH-1608CGCK.pdf, LatestRevisionDate=03.07.2017, Mounted=Yes, PackageDescription="SMT Green LED, Case 0603, Body L 1.6 x W 0.8mm H 0.65mm", Part Description="SMD Green LED, Case 1.6mmX0.8mm(0603), 0.65mm Thickness", Part Number=LED_KINGBRIGHT_KPH-1608CGCK, Pin Count=2, PressFit=No, Sense=No, SMD=Yes, Socket=No
NUT1 NUT2: library part BOSSARD_BN628-1241389_v, "Nut", Manufacturer=BOSSARD, Manufacturer Part Number="BN628 Art.1241389", Author="CERN DEM JMW", ComponentHeight=1.3mm, Component Type=Mechanical, CreateDate=04.12.2015, HelpURL=\\cern.ch\dfs\Applications\Altium\Datasheets\BOSSARD_BN628-1241389.pdf, LatestRevisionDate=04.12.2015, Mounted=Yes, PackageDescription="M1.6 Hexagon Nut ~0,8d, ISO 4032, DIN 934, Stainless Steel A2", Part Description="M1.6 Hexagon Nut ~0,8d, ISO 4032, DIN 934, Stainless Steel A2", Part Number=BOSSARD_BN628-1241389_v, Pin Count=0, PressFit=No, Sense=No, SMD=No, Socket=No, Status=None
R125: library part R0603_11K8_0.1%_0.063W_10PPM, "Resistor - 0.1%", Case=0603, Manufacturer=GENERIC, Manufacturer1 ComponentHeight=0.5mm, Manufacturer1 Example="TYCO HOLSWORTHY", Manufacturer1 Part Number=RN73C1J11K8BTDF, Power=0.063W, Tolerance=±0.1%, Author="CERN DEM JLC", Component Type=Standard, CreateDate=03.12.2007, HelpURL=\\cern.ch\dfs\Applications\Altium\Datasheets\R0603_Tyco_RN73.pdf, LatestRevisionDate=13.03.2008, Manufacturer Part Number=R0603_11K8_0.1%_0.063W_10PPM, Mounted=Yes, Part Description="Thin Film Chip Resistor", Part Number=R0603_11K8_0.1%_0.063W_10PPM, Pin Count=2, Sense=No, SMD=Yes, Socket=No, Status="Not recommended", TC=±10ppm
R126: library part R0603_5K62_0.1%_0.063W_10PPM, "Resistor - 0.1%", Case=0603, Manufacturer=GENERIC, Manufacturer1 ComponentHeight=0.5mm, Manufacturer1 Example="TYCO HOLSWORTHY", Manufacturer1 Part Number=RN73C1J5K62BTDF, Power=0.063W, Tolerance=±0.1%, Author="CERN DEM JLC", Component Type=Standard, CreateDate=03.12.2007, HelpURL=\\cern.ch\dfs\Applications\Altium\Datasheets\R0603_Tyco_RN73.pdf, LatestRevisionDate=13.03.2008, Manufacturer Part Number=R0603_5K62_0.1%_0.063W_10PPM, Mounted=Yes, Part Description="Thin Film Chip Resistor", Part Number=R0603_5K62_0.1%_0.063W_10PPM, Pin Count=2, Sense=No, SMD=Yes, Socket=No, Status="Not recommended", TC=±10ppm
R127: library part R0603_1K78_0.1%_0.063W_10PPM, "Resistor - 0.1%", Case=0603, Manufacturer=GENERIC, Manufacturer1 ComponentHeight=0.5mm, Manufacturer1 Example="TYCO HOLSWORTHY", Manufacturer1 Part Number=RN73C1J1K78BTDF, Power=0.063W, Tolerance=±0.1%, Author="CERN DEM JLC", Component Type=Standard, CreateDate=03.12.2007, HelpURL=\\cern.ch\dfs\Applications\Altium\Datasheets\R0603_Tyco_RN73.pdf, LatestRevisionDate=13.03.2008, Manufacturer Part Number=R0603_1K78_0.1%_0.063W_10PPM, Mounted=Yes, Part Description="Thin Film Chip Resistor", Part Number=R0603_1K78_0.1%_0.063W_10PPM, Pin Count=2, Sense=No, SMD=Yes, Socket=No, Status="Not recommended", TC=±10ppm
R128 R132 R134: library part R0402_10K_1%_0.0625W_100PPM, "Resistor - 1%", Case=0402, Manufacturer=GENERIC, Manufacturer1 ComponentHeight=0.4mm, Manufacturer1 Example="YAGEO PHYCOMP", Manufacturer1 Part Number=232270671003L, Power=0.0625W, Tolerance=±1%, Author="CERN DEM JLC", Component Type=Standard, CreateDate=03.12.2007, HelpURL=\\cern.ch\dfs\Applications\Altium\Datasheets\R0402_Phycomp_RC0402.pdf, LatestRevisionDate=17.10.2012, Manufacturer Part Number=R0402_10K_1%_0.0625W_100PPM, Mounted=Yes, Part Description="General Purpose Thick Film Chip Resistor", Part Number=R0402_10K_1%_0.0625W_100PPM, Pin Count=2, PressFit=No, Sense=No, SMD=Yes, Socket=No, Status="Not Recommended", TC=±100ppm/°C
R129: library part R0402_200K_1%_0.0625W_100PPM, "Resistor - 1%", Case=0402, Manufacturer=GENERIC, Manufacturer1 ComponentHeight=0.4mm, Manufacturer1 Example="YAGEO PHYCOMP", Manufacturer1 Part Number=232270672004L, Power=0.0625W, Tolerance=±1%, Author="CERN DEM JLC", Component Type=Standard, CreateDate=03.12.2007, HelpURL=\\cern.ch\dfs\Applications\Altium\Datasheets\R0402_Phycomp_RC0402.pdf, LatestRevisionDate=17.10.2012, Manufacturer Part Number=R0402_200K_1%_0.0625W_100PPM, Mounted=Yes, Part Description="General Purpose Thick Film Chip Resistor", Part Number=R0402_200K_1%_0.0625W_100PPM, Pin Count=2, Sense=No, SMD=Yes, Socket=No, Status="Not recommended", TC=±100ppm/°C
R130: library part R0402_100K_1%_0.0625W_100PPM, "Resistor - 1%", Case=0402, Manufacturer=GENERIC, Manufacturer1 ComponentHeight=0.4mm, Manufacturer1 Example="YAGEO PHYCOMP", Manufacturer1 Part Number=232270671004L, Power=0.0625W, Tolerance=±1%, Author="CERN DEM JLC", Component Type=Standard, CreateDate=03.12.2007, HelpURL=\\cern.ch\dfs\Applications\Altium\Datasheets\R0402_Phycomp_RC0402.pdf, LatestRevisionDate=17.10.2012, Manufacturer Part Number=R0402_100K_1%_0.0625W_100PPM, Mounted=Yes, Part Description="General Purpose Thick Film Chip Resistor", Part Number=R0402_100K_1%_0.0625W_100PPM, Pin Count=2, PressFit=No, Sense=No, SMD=Yes, Socket=No, Status="Not Recommended", TC=±100ppm/°C
R131: library part R0402_43K_1%_0.0625W_100PPM, "Resistor - 1%", Case=0402, Manufacturer=GENERIC, Manufacturer1 ComponentHeight=0.4mm, Manufacturer1 Example="YAGEO PHYCOMP", Manufacturer1 Part Number=232270674303L, Power=0.0625W, Tolerance=±1%, Author="CERN DEM JLC", Component Type=Standard, CreateDate=03.12.2007, HelpURL=\\cern.ch\dfs\Applications\Altium\Datasheets\R0402_Phycomp_RC0402.pdf, LatestRevisionDate=17.10.2012, Manufacturer Part Number=R0402_43K_1%_0.0625W_100PPM, Mounted=Yes, Part Description="General Purpose Thick Film Chip Resistor", Part Number=R0402_43K_1%_0.0625W_100PPM, Pin Count=2, PressFit=No, Sense=No, SMD=Yes, Socket=No, Status="Not Recommended", TC=±100ppm/°C
R133 R137: library part R0402_1K_1%_0.0625W_100PPM, "Resistor - 1%", Case=0402, Manufacturer=GENERIC, Manufacturer1 ComponentHeight=0.4mm, Manufacturer1 Example="YAGEO PHYCOMP", Manufacturer1 Part Number=232270671002L, Power=0.0625W, Tolerance=±1%, Author="CERN DEM JLC", Component Type=Standard, CreateDate=03.12.2007, HelpURL=\\cern.ch\dfs\Applications\Altium\Datasheets\R0402_Phycomp_RC0402.pdf, LatestRevisionDate=17.10.2012, Manufacturer Part Number=R0402_1K_1%_0.0625W_100PPM, Mounted=Yes, Part Description="General Purpose Thick Film Chip Resistor", Part Number=R0402_1K_1%_0.0625W_100PPM, Pin Count=2, PressFit=No, Sense=No, SMD=Yes, Socket=No, Status="Not Recommended", TC=±100ppm/°C
R135: library part R0402_160K_1%_0.0625W_100PPM, "Resistor - 1%", Case=0402, Manufacturer=GENERIC, Manufacturer1 ComponentHeight=0.4mm, Manufacturer1 Example="YAGEO PHYCOMP", Manufacturer1 Part Number=232270671604L, Power=0.0625W, Tolerance=±1%, Author="CERN DEM JLC", Component Type=Standard, CreateDate=03.12.2007, HelpURL=\\cern.ch\dfs\Applications\Altium\Datasheets\R0402_Phycomp_RC0402.pdf, LatestRevisionDate=17.10.2012, Manufacturer Part Number=R0402_160K_1%_0.0625W_100PPM, Mounted=Yes, Part Description="General Purpose Thick Film Chip Resistor", Part Number=R0402_160K_1%_0.0625W_100PPM, Pin Count=2, PressFit=No, Sense=No, SMD=Yes, Socket=No, Status="Not Recommended", TC=±100ppm/°C
R136: library part R0402_56K_1%_0.0625W_100PPM, "Resistor - 1%", Case=0402, Manufacturer=GENERIC, Manufacturer1 ComponentHeight=0.4mm, Manufacturer1 Example="YAGEO PHYCOMP", Manufacturer1 Part Number=232270675603L, Power=0.0625W, Tolerance=±1%, Author="CERN DEM JLC", Component Type=Standard, CreateDate=03.12.2007, HelpURL=\\cern.ch\dfs\Applications\Altium\Datasheets\R0402_Phycomp_RC0402.pdf, LatestRevisionDate=17.10.2012, Manufacturer Part Number=R0402_56K_1%_0.0625W_100PPM, Mounted=Yes, Part Description="General Purpose Thick Film Chip Resistor", Part Number=R0402_56K_1%_0.0625W_100PPM, Pin Count=2, PressFit=No, Sense=No, SMD=Yes, Socket=No, Status="Not Recommended", TC=±100ppm/°C
TP25 TP26 TP27 TP28 TP29 TP30 TP31 TP32 TP33 TP34: library part SMD_PAD_1.27X1.27MM, Author="CERN DEM JLC", ComponentHeight=0mm, Component Type="Standard (No BOM)", CreateDate=12.01.2008, Family="Test Point", HelpURL=Undefined, LatestRevisionDate=12.01.2008, Mounted=No, PackageDescription="1.27mm x 1.27mm PCB Copper Area (SMD Test Point)", Part Description="1.27mm x 1.27mm PCB Copper Area (SMD Test Point)", Part Number=SMD_PAD_1.27X1.27MM, Pin Count=1, Sense=No, SMD=Yes, Socket=No, Status=None

## Via types
v1: diameter 15.75, hole 7.87, TOP to BOTTOM, tented both sides, 116 vias
v2: diameter 23.62, hole 15.75, TOP to BOTTOM, tented both sides, 25 vias
v3: diameter 23.62, hole 11.81, TOP to BOTTOM, tented both sides, 25 vias